# EAGLE board PCB (EAGLE 9.7.0)
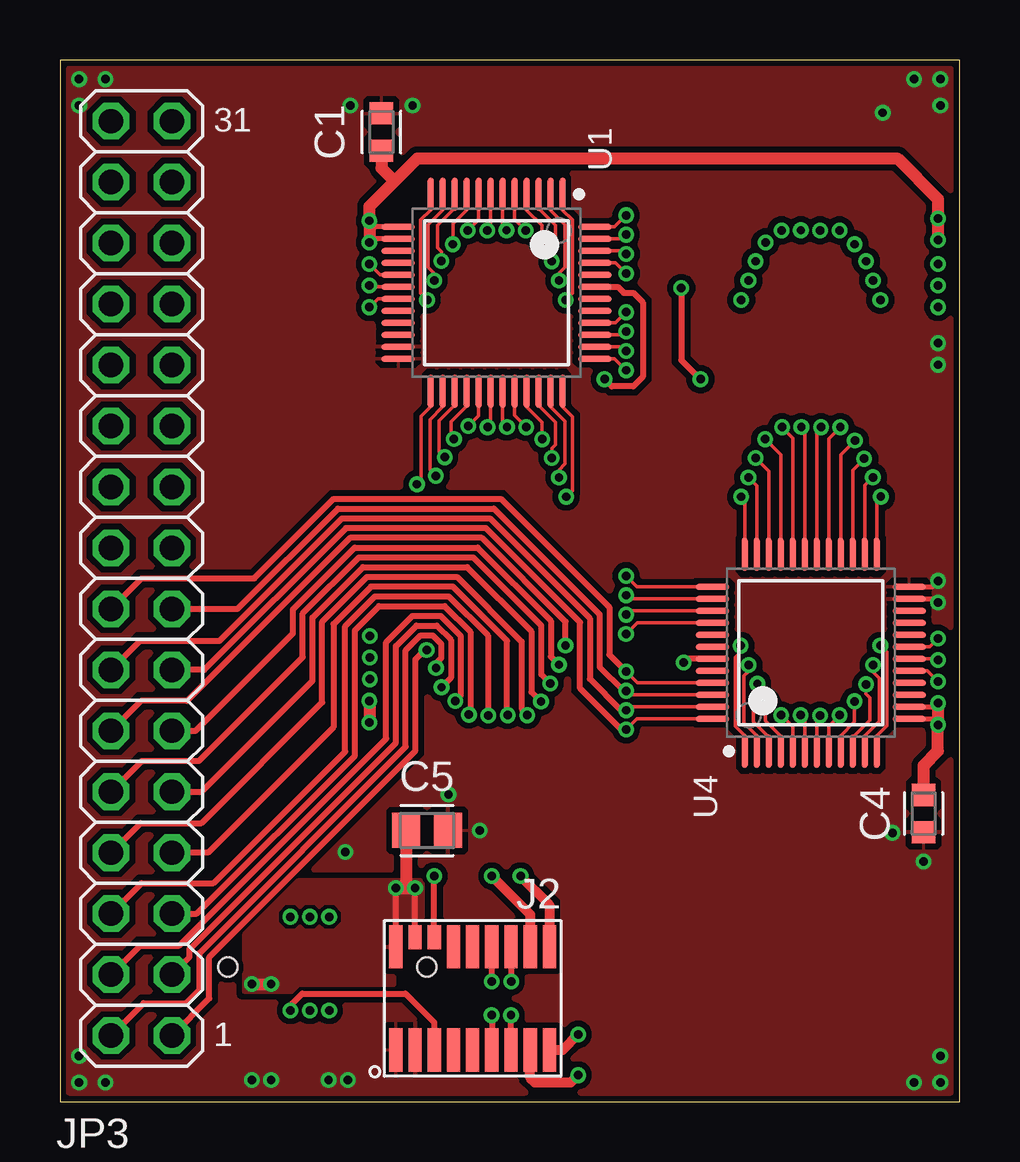
[diagram p0: board, top side]
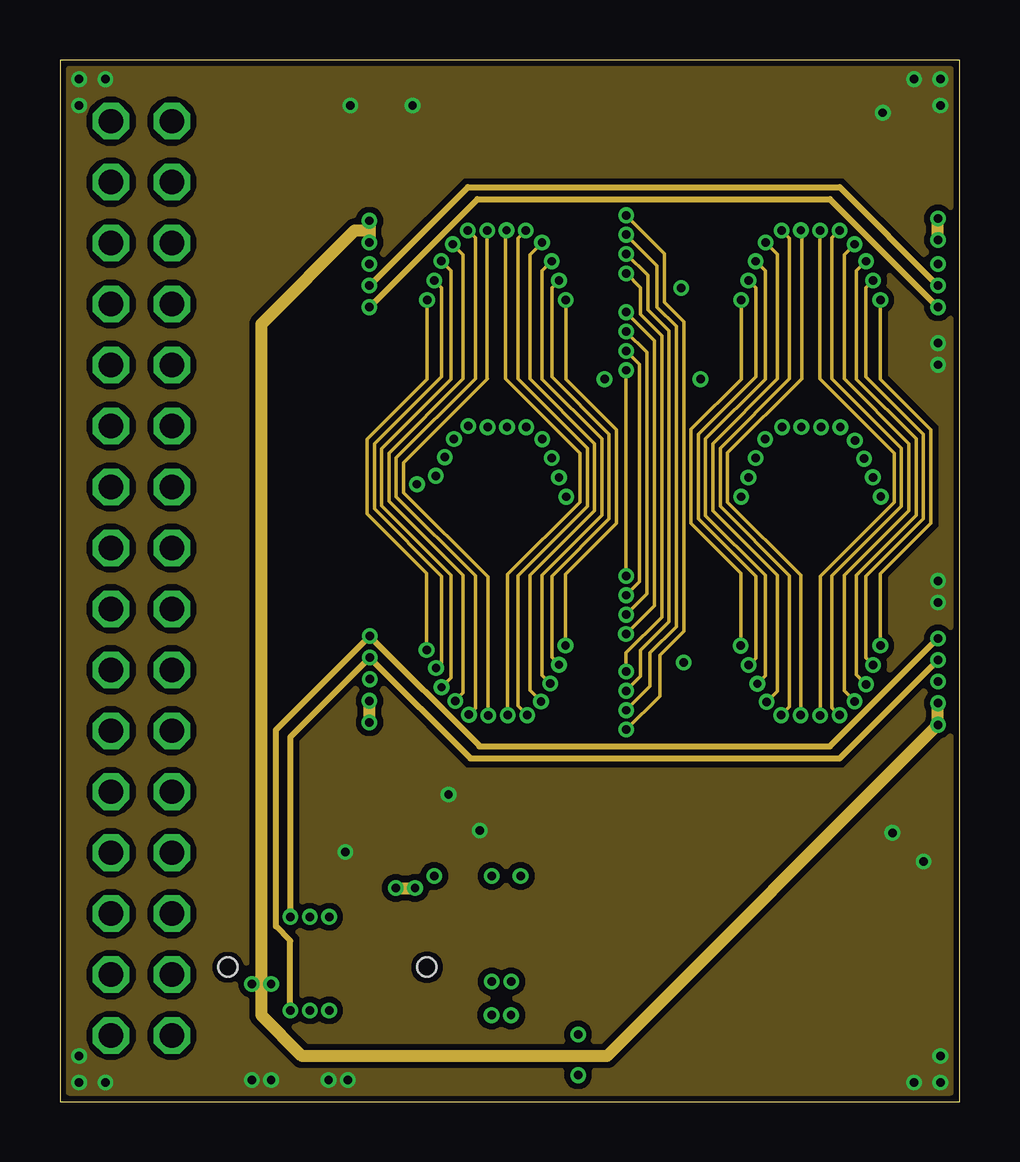
[diagram p1: board, inner layer Route2]
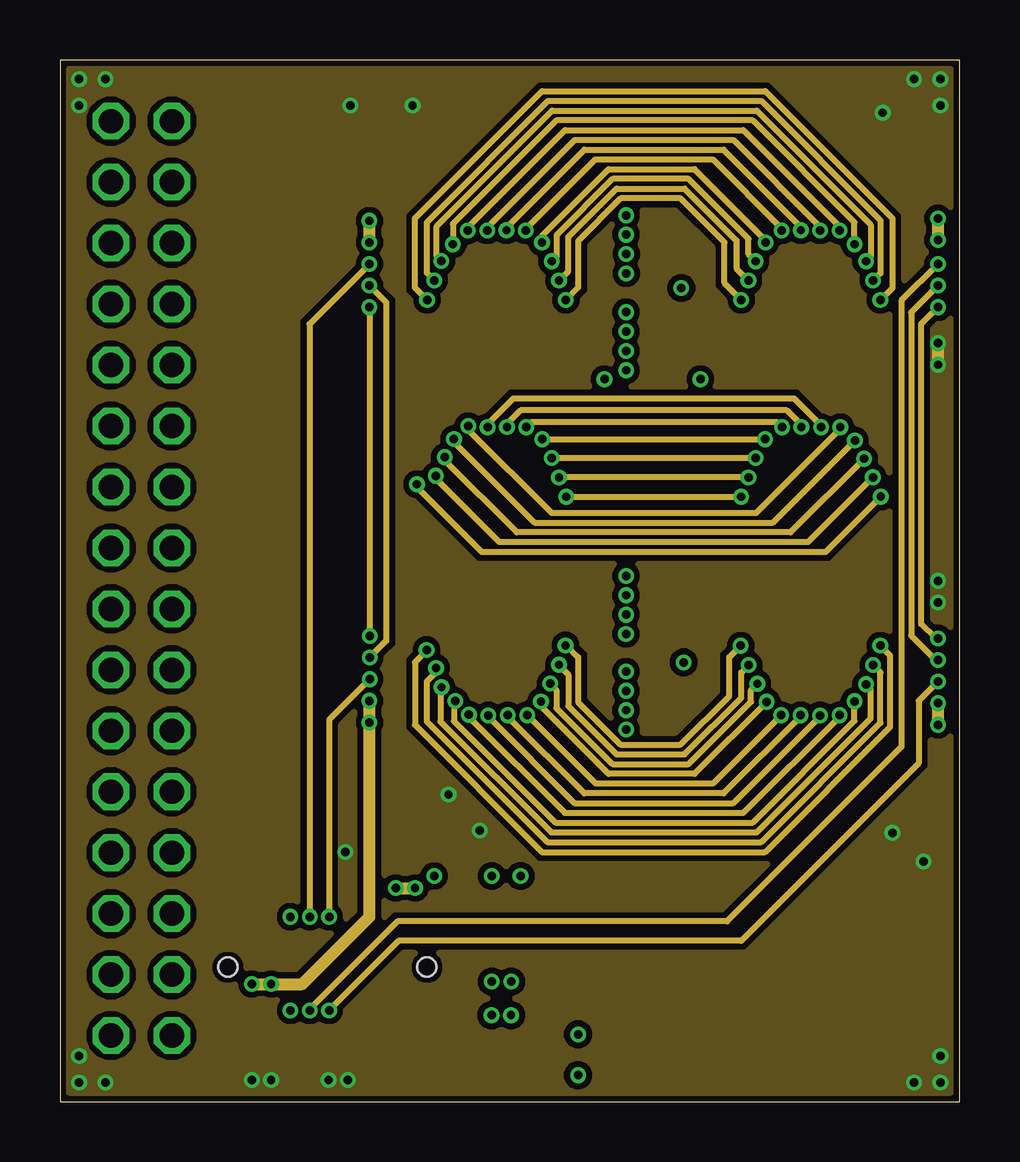
[diagram p2: board, inner layer Route15]
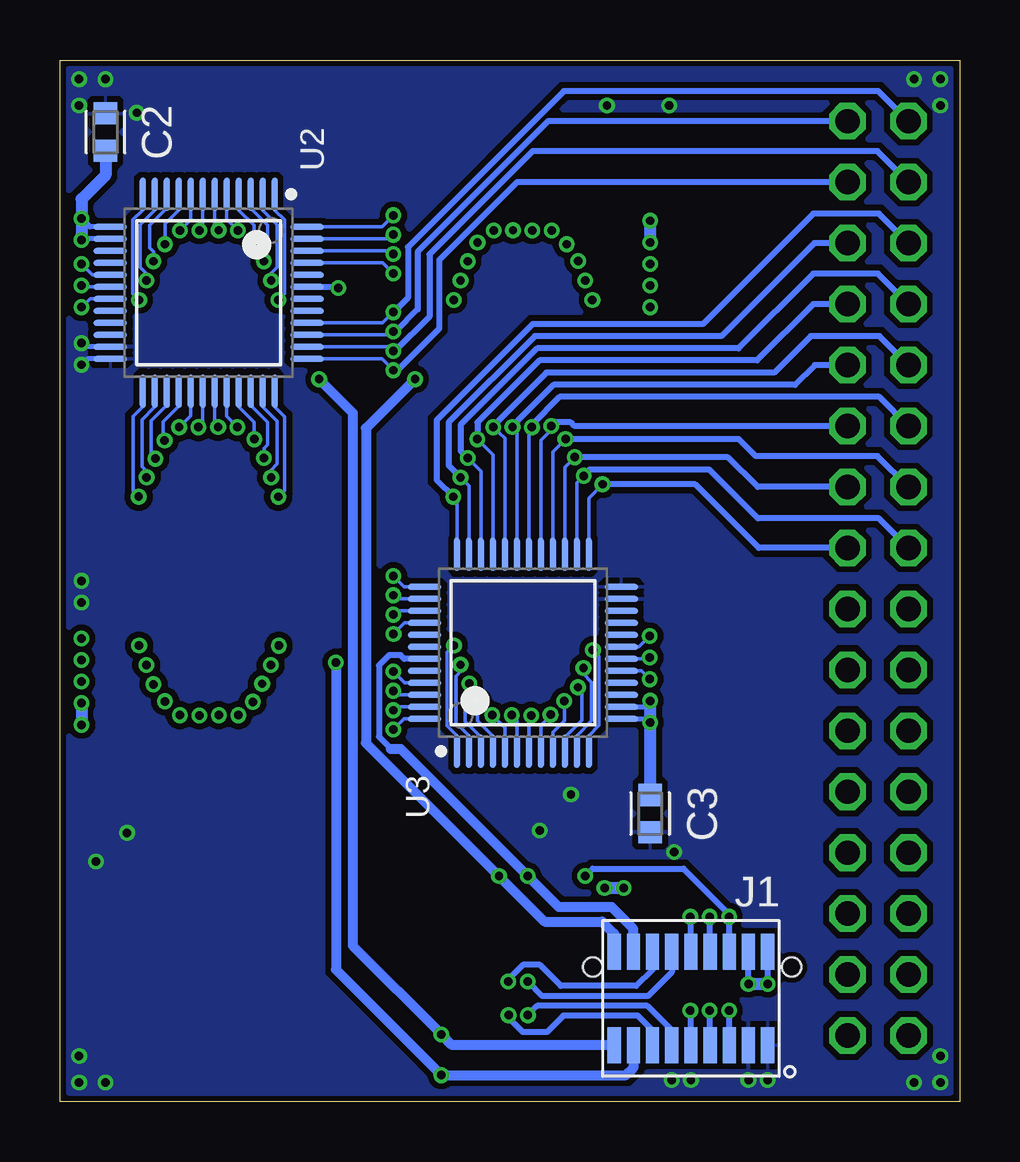
[diagram p3: board, bottom side, seen from below]

Size 37.5 x 43.4 mm. Coordinates in mm from the lower left corner, seen from the top.
Outline: 0,0 37.5,0 37.5,43.4 0,43.4 0,0
Copper layers (1+2*15+16): Top 0.035mm / dielectric 1.5mm / Route2 0.035mm / dielectric 0.15mm / Route15 0.035mm / dielectric 0.2mm / Bottom 0.035mm
Design rules "default *": minimum track width 6mil, minimum drill 0.35mm, track to track 6mil, track to pad 6mil, pad to pad 6mil, via to via 6mil, smd to smd 6mil, copper to edge 10mil, drill to drill 6mil, minimum pad ring 10mil, minimum via ring 6mil, stop-mask expansion 3mil, vias tented up to drill 15mil, thermal gap 10mil
tKeepout: area 6,0 to 12,43.4

## Footprints (pad centres in the part's own frame; a part is rotated, then mirrored left to right if it is on the bottom)
CAPC1608X85 = smd 0.921 x 0.97: 1 -0.775,0; 2 0.775,0
CAPC2012X110 = smd 1.165 x 1.465: 1 -0.875,0; 2 0.875,0
MOLEX_52465-1870 = smd 0.55 x 1.5: P$1 -3.2,1.95; P$2 -3.2,-1.95; P$3 -2.4,1.95; P$4 -2.4,-1.95; P$5 -1.6,1.95; P$6 -1.6,-1.95; P$7 -0.8,1.95; P$8 -0.8,-1.95; P$9 0,1.95; P$10 0,-1.95; P$11 0.8,1.95; P$12 0.8,-1.95; P$13 1.6,1.95; P$14 1.6,-1.95; P$15 2.4,1.95; P$16 2.4,-1.95; P$17 3.2,1.95; P$18 3.2,-1.95 | hole 0.8: -4.2,-1.3; 4.1,-1.3
MOLEX_53307-1871_MOD = smd 0.55 x 1.8: P$1 3.2,2.15; P$2 3.2,-2.15; P$3 2.4,2.15; P$5 1.6,2.15; P$7 0.8,2.15; P$8 0.8,-2.15; P$9 0,2.15; P$10 0,-2.15; P$11 -0.8,2.15; P$12 -0.8,-2.15; P$13 -1.6,2.15; P$14 -1.6,-2.15; P$15 -2.4,2.15; P$16 -2.4,-2.15; P$17 -3.2,2.15; P$18 -3.2,-2.15 | smd 0.55 x 1: P$4 2.4,-2.55; P$6 1.6,-2.55
2X16 = drill 1.016 octagon: 1 -19.05,-1.27; 2 -19.05,1.27; 3 -16.51,-1.27; 4 -16.51,1.27; 5 -13.97,-1.27; 6 -13.97,1.27; 7 -11.43,-1.27; 8 -11.43,1.27; 9 -8.89,-1.27; 10 -8.89,1.27; 11 -6.35,-1.27; 12 -6.35,1.27; 13 -3.81,-1.27; 14 -3.81,1.27; 15 -1.27,-1.27; 16 -1.27,1.27; 17 1.27,-1.27; 18 1.27,1.27; 19 3.81,-1.27; 20 3.81,1.27; 21 6.35,-1.27; 22 6.35,1.27; 23 8.89,-1.27; 24 8.89,1.27; 25 11.43,-1.27; 26 11.43,1.27; 27 13.97,-1.27; 28 13.97,1.27; 29 16.51,-1.27; 30 16.51,1.27; 31 19.05,-1.27; 32 19.05,1.27
ANALOG_DEVICES_ADG731BSUZ_0 = smd 1.4 x 0.25: 1 -4.1,2.75; 2 -4.1,2.25; 3 -4.1,1.75; 4 -4.1,1.25; 5 -4.1,0.75; 6 -4.1,0.25; 7 -4.1,-0.25; 8 -4.1,-0.75; 9 -4.1,-1.25; 10 -4.1,-1.75; 11 -4.1,-2.25; 12 -4.1,-2.75; 25 4.1,-2.75; 26 4.1,-2.25; 27 4.1,-1.75; 28 4.1,-1.25; 29 4.1,-0.75; 30 4.1,-0.25; 31 4.1,0.25; 32 4.1,0.75; 33 4.1,1.25; 34 4.1,1.75; 35 4.1,2.25; 36 4.1,2.75 | smd 0.25 x 1.4: 13 -2.75,-4.1; 14 -2.25,-4.1; 15 -1.75,-4.1; 16 -1.25,-4.1; 17 -0.75,-4.1; 18 -0.25,-4.1; 19 0.25,-4.1; 20 0.75,-4.1; 21 1.25,-4.1; 22 1.75,-4.1; 23 2.25,-4.1; 24 2.75,-4.1; 37 2.75,4.1; 38 2.25,4.1; 39 1.75,4.1; 40 1.25,4.1; 41 0.75,4.1; 42 0.25,4.1; 43 -0.25,4.1; 44 -0.75,4.1; 45 -1.25,4.1; 46 -1.75,4.1; 47 -2.25,4.1; 48 -2.75,4.1

## Placement (x,y rotation side)
C1  0.1uF  [CAPC1608X85]  13.4,40.4 270 top
C2  0.1uF  [CAPC1608X85]  35.6,40.4 270 bottom
C3  0.1uF  [CAPC1608X85]  12.9,12 90 bottom
C4  0.1uF  [CAPC1608X85]  36,12 90 top
C5  10uF  [CAPC2012X110]  15.3,11.3 180 top
J1  MOLEX_52465-1870  [MOLEX_52465-1870]  11.2,4.3 180 bottom
J2  MOLEX_53307-1871MOD  [MOLEX_53307-1871_MOD]  17.2,4.3 180 top
JP3  PINHD-2X16  [2X16]  3.4,21.8 90 top
U1  ANALOG_DEVICES_ADG731BSUZANALOG_DEVICES_ADG731BSUZ_0_0  [ANALOG_DEVICES_ADG731BSUZ_0]  18.2,33.7 270 top
U2  ANALOG_DEVICES_ADG731BSUZANALOG_DEVICES_ADG731BSUZ_0_0  [ANALOG_DEVICES_ADG731BSUZ_0]  31.3,33.7 270 bottom
U3  ANALOG_DEVICES_ADG731BSUZANALOG_DEVICES_ADG731BSUZ_0_0  [ANALOG_DEVICES_ADG731BSUZ_0]  18.2,18.7 90 bottom
U4  ANALOG_DEVICES_ADG731BSUZANALOG_DEVICES_ADG731BSUZ_0_0  [ANALOG_DEVICES_ADG731BSUZ_0]  31.3,18.7 90 top

## Library data of the parts
C1-C5 = Capacitor; CATEGORY: Capacitor
J1 = Molex 52465-1870
J2 = Molex 53307-1871
JP3 = Connector
U1-U4 = Analog Devices - ADG731BSUZ; BANDWIDTH_HZ: 18M; CIIVA_IDS: 19300650; CODE__JEDEC: MS-026ABC; COMPONENT_LINK_1_DESCRIPTION: Manufacturer URL; COMPONENT_LINK_1_URL: http://www.analog.com/en/index.html; COMPONENT_LINK_3_DESCRIPTION: Package Specification; COMPONENT_LINK_3_URL: http://www.analog.com/static/imported-files/packages/470644706845302410119987SU48_7x7.pdf; DATASHEET: http://www.analog.com/static/imported-files/data_sheets/ADG725_731.pdf; DATASHEET_VERSION: Rev. A; FOOTPRINT_VARIANT_NAME_0: Level C; FOOTPRINT_VARIANT_NAME_1: Level B; FOOTPRINT_VARIANT_NAME_2: Level A; IMPORTED: yes; IMPORTED_FROM: vault; IMPORT_TS: 1521857462; MAX_ANALOG_SIGNAL_RANGE: Vss to Vdd; MF: Analog Devices; MOUNTING_TECHNOLOGY: Surface Mount; MPN: ADG731BSUZ; PACKAGE: SU-48; PACKAGE_DESCRIPTION: 48-Pin Thin Plastic Quad Flat Package, Body 7 x 7 mm, Pitch 0.5 mm; PACKING: Tray; PIN_0_0_39_INSIDE_EDGE: clock; PREFIX: U; RELEASE_DATE: 1391089390; RON_OHMS: 4; SUPPLY_V_GUAR_PERFORMANCE: Dual_(+/-2.5V), Single_(+3V), Single_(+5V); T_TRANSITION_S: 42n; VAULT_GUID: 76926279-8684-441A-80C4-6DFBDCC65274; VAULT_REVISION: 8C21F4D2-BBAB-4E50-B4EF-AC8EEE00B0BF

## Nets
+5V: C1.2 C2.2 C3.2 C4.2 C5.2 J1.P$2 J1.P$4 J2.P$2 J2.P$4 U1.13 U1.14 U2.13 U2.14 U3.13 U3.14 U4.13 U4.14
CS1: J1.P$10 U3.17
CS2: J1.P$8 U1.17
CS3: J1.P$9 U4.17
CS4: J1.P$7 U2.17
CS5: J1.P$14 J2.P$14
CS6: J1.P$12 J2.P$12
CS7: J1.P$13 J2.P$13
CS8: J1.P$11 J2.P$11
D1: J1.P$16 J2.P$16 U3.43
D2: J1.P$18 J2.P$18 U1.43
D3: J1.P$15 J2.P$15 U4.43
D4: J1.P$17 J2.P$17 U2.43
DAT: J1.P$6 J2.P$6 U1.18 U2.18 U3.18 U4.18
GND: C1.1 C2.1 C3.1 C4.1 C5.1 J1.P$1 J1.P$3 J2.P$1 J2.P$3 U1.23 U1.24 U2.23 U2.24 U3.23 U3.24 U4.23 U4.24
S1: JP3.1 U1.12 U2.12 U3.12 U4.12
S2: JP3.2 U1.11 U2.11 U3.11 U4.11
S3: JP3.3 U1.10 U2.10 U3.10 U4.10
S4: JP3.4 U1.9 U2.9 U3.9 U4.9
S5: JP3.5 U1.8 U2.8 U3.8 U4.8
S6: JP3.6 U1.7 U2.7 U3.7 U4.7
S7: JP3.7 U1.6 U2.6 U3.6 U4.6
S8: JP3.8 U1.5 U2.5 U3.5 U4.5
S9: JP3.9 U1.4 U2.4 U3.4 U4.4
S10: JP3.10 U1.3 U2.3 U3.3 U4.3
S11: JP3.11 U1.2 U2.2 U3.2 U4.2
S12: JP3.12 U1.1 U2.1 U3.1 U4.1
S13: JP3.13 U1.48 U2.48 U3.48 U4.48
S14: JP3.14 U1.47 U2.47 U3.47 U4.47
S15: JP3.15 U1.46 U2.46 U3.46 U4.46
S16: JP3.16 U1.45 U2.45 U3.45 U4.45
S17: JP3.17 U1.25 U2.25 U3.25 U4.25
S18: JP3.18 U1.26 U2.26 U3.26 U4.26
S19: JP3.19 U1.27 U2.27 U3.27 U4.27
S20: JP3.20 U1.28 U2.28 U3.28 U4.28
S21: JP3.21 U1.29 U2.29 U3.29 U4.29
S22: JP3.22 U1.30 U2.30 U3.30 U4.30
S23: JP3.23 U1.31 U2.31 U3.31 U4.31
S24: JP3.24 U1.32 U2.32 U3.32 U4.32
S25: JP3.25 U1.33 U2.33 U3.33 U4.33
S26: JP3.26 U1.34 U2.34 U3.34 U4.34
S27: JP3.27 U1.35 U2.35 U3.35 U4.35
S28: JP3.28 U1.36 U2.36 U3.36 U4.36
S29: JP3.29 U1.37 U2.37 U3.37 U4.37
S30: JP3.30 U1.38 U2.38 U3.38 U4.38
S31: JP3.31 U1.39 U2.39 U3.39 U4.39
S32: JP3.32 U1.40 U2.40 U3.40 U4.40
SCLK: J1.P$5 J2.P$5 U1.19 U2.19 U3.19 U4.19

## Tracks (layer width: path | path; a pad name or v marks a point on that pad's centre or on a via)
+5V  (via drill 0.35)
  Top 0.203: U1.14 13.05,35.95 v12.9,35.8 | U1.13 13.15,36.45 v12.9,36.7 | U4.14 36.45,16.45 v36.6,16.6 | U4.13 36.35,15.95 v36.6,15.7
  Top 0.254: J2.P$2 v14,8.9 | J2.P$4 v14.8,8.9
  Top 0.508: 13.95,38.35 12.9,37.3 v12.9,36.7 v12.9,35.8 | 13.95,38.35 14.9,39.3 34.9,39.3 36.6,37.6 v36.6,36.8 v36.6,35.9 | C1.2 13.4,38.9 13.95,38.35 | C4.2 36,14 36.6,14.6 v36.6,15.7 v36.6,16.6 | v12.9,16.7 v12.9,15.8 | v14,8.9 14.4,8.9 | 14.4,8.9 v14.8,8.9 | C5.2 14.43,8.93 14.4,8.9 | v8,4.9 v8.8,4.9
  Route2 0.508: v12.9,36.7 12.9,36.3 | 12.9,36.3 v12.9,35.8 | v8,4.9 8.4,4.9 | 8.4,4.9 v8.8,4.9 | 8.4,4.9 8.4,32.4 12.3,36.3 12.9,36.3 | v36.6,16.6 v36.6,15.7 22.8,1.9 10.1,1.9 8.4,3.6 8.4,4.9 | v14,8.9 v14.8,8.9 | v12.9,15.8 v12.9,16.7 | v36.6,35.9 v36.6,36.8
  Route15 0.508: v8,4.9 v8.8,4.9 10.1,4.9 12.9,7.7 v12.9,15.8 v12.9,16.7 | v14,8.9 v14.8,8.9 | v12.9,35.8 v12.9,36.7 | v36.6,36.8 v36.6,35.9 | v36.6,16.6 v36.6,15.7
  Bottom 0.203: U2.14 36.55,35.95 v36.6,35.9 | U2.13 36.25,36.45 v36.6,36.8 | U3.14 13.15,16.45 v12.9,16.7 | U3.13 13.05,15.95 v12.9,15.8
  Bottom 0.254: v8.8,4.9 J1.P$4 | v8,4.9 J1.P$2
  Bottom 0.508: C2.2 35.6,38.6 36.6,37.6 v36.6,36.8 v36.6,35.9 | C3.2 v12.9,15.8 v12.9,16.7 | v8,4.9 v8.8,4.9 | v14,8.9 v14.8,8.9 | v12.9,36.7 v12.9,35.8 | v36.6,16.6 v36.6,15.7
  pour Top: 7.6,4.5 14,4.5 14,6.8 15.2,6.8 15.2,9.3 7.6,9.3
CS1  (via drill 0.35, 0.35 pad 0.55)
  Route15 0.254: v12.91,17.6 11.22,15.91 v11.22,7.7
  Bottom 0.152: U3.17 13.26,17.95 v12.91,17.6
  Bottom 0.254: J1.P$10 11.2,7.68 v11.22,7.7
CS2  (via drill 0.35, 0.35 pad 0.55)
  Top 0.152: U1.17 13.35,34.45 v12.9,34.9
  Route15 0.254: v12.9,34.9 10.4,32.4 10.4,7.71 v10.41,7.7
  Bottom 0.254: J1.P$8 10.4,7.69 v10.41,7.7
CS3  (via drill 0.35, 0.35 pad 0.55)
  Top 0.152: v36.6,17.5 36.15,17.95 U4.17
  Route15 0.254: v36.6,17.5 35.8,16.7 35.8,14.1 28.4,6.7 14.12,6.7 v11.22,3.8
  Bottom 0.254: J1.P$9 11.2,3.78 v11.22,3.8
CS4  (via drill 0.35, 0.35 pad 0.55)
  Route15 0.254: v10.41,3.8 10.41,3.85 14.07,7.51 27.81,7.51 35.08,14.78 35.08,33.38 v36.6,34.9
  Bottom 0.152: v36.6,34.9 36.15,34.45 U2.17
  Bottom 0.254: J1.P$7 10.4,3.79 v10.41,3.8
CS5  (via drill 0.35)
  Top 0.254: v18.81,5 J2.P$14
  Bottom 0.254: v18.81,5 18.81,5.09 18.2,5.7 17.5,5.7 16.62,4.82 13.48,4.82 12.8,5.5 J1.P$14
CS6  (via drill 0.35)
  Top 0.254: v18,5 J2.P$12
  Bottom 0.254: v18,5 17.4,4.4 13,4.4 12,5.4 J1.P$12
CS7  (via drill 0.35)
  Top 0.254: J2.P$13 v18.8,3.6
  Bottom 0.254: v18.8,3.6 18.8,3.5 18.2,2.9 17.2,2.9 16.52,3.58 13.41,3.58 12.8,2.97 J1.P$13
CS8  (via drill 0.35)
  Top 0.254: v17.99,3.6 v18,3.59 J2.P$11
  Bottom 0.254: v17.99,3.6 17.61,3.99 13.02,3.99 12,2.97 J1.P$11
D1  (via drill 0.35)
  Top 0.406: v18,9.4 19.6,7.8 J2.P$16
  Bottom 0.254: U3.43 23.15,18.45 23.3,18.6 23.78,18.6 24.21,18.17 24.21,15.21 23.7,14.7
  Bottom 0.406: 23.7,14.7 23.3,14.7 v18,9.4 16.7,8.1 14.5,8.1 13.6,7.2 J1.P$16
D2  (via drill 0.35)
  Top 0.254: U1.43 23.25,33.95 23.5,33.7 23.9,33.7 24.3,33.3 24.3,30.2 23.9,29.8 23,29.8 v22.7,30.1
  Top 0.406: v19.2,9.4 20.4,8.2 J2.P$18
  Bottom 0.406: v22.7,30.1 24.74,28.06 24.74,14.94 v19.2,9.4 17.3,7.5 14.9,7.5 14.4,7 J1.P$18
D3  (via drill 0.35)
  Top 0.254: U4.43 26.15,18.45 v26,18.3
  Top 0.406: v21.6,1.1 21.3,0.8 19.8,0.8 19.6,1 J2.P$15
  Bottom 0.406: v26,18.3 26,5.5 v21.6,1.1 13.9,1.1 13.6,1.4 J1.P$15
D4  (via drill 0.35)
  Top 0.254: v25.9,33.9 25.9,30.9 v26.7,30.1
  Top 0.406: v21.6,2.8 20.95,2.15 J2.P$17
  Bottom 0.254: U2.43 25.95,33.95 v25.9,33.9
  Bottom 0.406: v26.7,30.1 25.3,28.7 25.3,6.5 v21.6,2.8 21.15,2.35 J1.P$17
DAT  (via drill 0.35, 0.35 pad 0.55)
  Top 0.152: U4.18 36.55,18.45 v36.6,18.4 | U1.18 12.95,33.95 v12.9,34
  Top 0.254: J2.P$6 v15.6,9.4
  Route2 0.254: v12.9,34 17,38.1 32.5,38.1 v36.6,34 | v36.6,18.4 32.5,14.3 17.11,14.3 v12.91,18.5 9.61,15.19 v9.61,7.7
  Route15 0.254: v12.9,34 13.6,33.3 13.6,19.2 12.91,18.51 v12.91,18.5 | v36.6,34 35.49,32.89 35.49,19.41 36.5,18.4 v36.6,18.4
  Bottom 0.152: U2.18 36.55,33.95 v36.6,34 | U3.18 12.96,18.45 v12.91,18.5
  Bottom 0.254: v15.6,9.4 15.29,9.71 11.51,9.71 9.61,7.81 v9.61,7.7 v9.6,7.69 J1.P$6
GND  (via drill 0.35)
  Top 0.203: U4.23 36.45,20.95 v36.6,20.8 | U4.24 36.35,21.45 v36.6,21.7
  Route15 0.508: v36.6,31.6 v36.6,30.7
  Bottom 0.203: U2.23 36.45,31.45 v36.6,31.6 | U2.24 36.35,30.95 v36.6,30.7
  other vias: 17.5,11.3 16.2,12.8 8.8,0.9 8,0.9 12,0.9 11.2,0.9 11.9,10.4 36,10 34.7,11.2 35.6,42.6 34.3,41.2 14.7,41.5 12.1,41.5 36.7,0.8 36.7,1.9 35.6,0.8 0.8,0.8 1.9,0.8 0.8,1.9 0.8,42.6 1.9,42.6 0.8,41.5 36.7,42.6 36.7,41.5
  pour Top (isolate 0.254, rank 2): 0,0 37.5,0 37.5,43.4 0,43.4
  pour Route2 (isolate 0.254): 0,0 37.5,0 37.5,43.4 0,43.4
  pour Route15 (isolate 0.254): 0,0 37.5,0 37.5,43.4 0,43.4
  pour Bottom (isolate 0.254, rank 2): 0,0 37.5,0 37.5,43.4 0,43.4
S1  (via drill 0.35 pad 0.55)
  Top 0.152: U1.12 15.45,37.15 15.04,36.74 15.04,33.67 v15.3,33.41 | U4.12 34.05,15.25 34.46,15.66 34.46,18.74 v34.2,19
  Top 0.254: JP3.1 6.22,4.3 6.22,6.02 14.82,14.62 14.82,18.42 15.2,18.8 15.27,18.8 v15.28,18.82
  Route2 0.152: v34.2,33.4 34.2,30.1 36.3,28 36.3,24.1 34.2,22 v34.2,19 | v15.3,33.41 v15.3,33.4 15.3,30.1 12.8,27.6 12.8,24.5 15.28,22.02 v15.28,18.82
  Route15 0.254: v15.3,33.41 14.8,33.91 14.8,36.8 20.1,42.1 29.4,42.1 34.7,36.8 34.7,33.9 v34.2,33.4 | v34.2,19 34.61,18.59 34.61,15.61 29.4,10.4 20.1,10.4 14.8,15.7 14.8,18.3 15.28,18.79 v15.28,18.82
  Bottom 0.152: U3.12 15.45,15.25 15.03,15.67 15.03,18.55 15.28,18.8 v15.28,18.82 | U2.12 34.05,37.15 34.46,36.74 34.46,33.66 v34.2,33.4
S2  (via drill 0.35 pad 0.55)
  Top 0.152: U1.11 15.95,37.15 15.34,36.54 15.34,34.77 15.6,34.51 v15.6,34.21 | U4.11 33.55,15.25 34.16,15.86 34.16,17.63 33.9,17.89 v33.9,18.19
  Top 0.254: JP3.2 3.48,4.1 5.25,4.1 5.81,4.66 5.81,6.19 14.41,14.79 14.41,18.81 15.03,19.43 15.54,19.43 15.89,19.07 15.89,18.48 15.68,18.27 v15.68,18.07
  Route2 0.152: v15.6,34.21 15.9,33.91 15.9,30.2 13.11,27.41 13.11,24.69 15.9,21.9 15.9,18.3 v15.68,18.07 | v33.9,18.19 33.6,18.49 33.6,21.9 35.99,24.3 35.99,27.8 33.6,30.2 33.6,33.91 v33.9,34.21
  Route15 0.254: v33.9,18.19 34.21,17.89 34.21,15.78 29.23,10.81 20.32,10.81 15.28,15.84 15.28,17.5 15.68,17.9 v15.68,18.07 | v15.6,34.21 15.29,34.52 15.29,36.64 20.35,41.69 29.23,41.69 34.21,36.72 34.21,34.51 v33.9,34.21
  Bottom 0.152: U3.11 15.95,15.25 15.33,15.87 15.33,17.48 15.68,17.83 v15.68,18.07 | U2.11 33.55,37.15 34.16,36.54 34.16,34.77 33.9,34.51 v33.9,34.21
S3  (via drill 0.35 pad 0.55)
  Top 0.152: U1.10 16.45,37.22 15.74,36.51 15.74,35.57 15.9,35.41 v15.9,35.02 | U4.10 33.05,15.18 33.76,15.89 33.76,16.83 33.6,16.99 v33.6,17.39
  Top 0.254: JP3.3 5.41,6.03 5.41,6.36 14.01,14.96 14.01,18.98 14.86,19.83 15.7,19.83 16.3,19.24 16.3,17.66 v15.91,17.27
  Route2 0.152: v15.9,35.02 v15.9,35.01 16.3,34.61 16.3,30.11 13.41,27.21 13.41,24.82 16.3,21.93 16.3,17.66 v15.91,17.27 | v33.6,17.39 33.2,17.79 33.2,21.93 35.69,24.42 35.69,27.61 33.2,30.11 33.2,34.61 v33.6,35.01
  Route15 0.254: v33.6,17.39 33.8,17.19 33.8,15.97 29.05,11.21 20.49,11.21 15.86,15.84 15.86,17.22 v15.91,17.27 | v15.9,35.02 15.7,35.22 15.7,36.47 20.52,41.29 29.05,41.29 33.8,36.53 33.8,35.21 v33.6,35.01
  Bottom 0.152: U3.10 16.45,15.18 15.74,15.89 15.74,17.1 v15.91,17.27 | U2.10 33.05,37.22 33.76,36.51 33.76,35.57 33.6,35.41 v33.6,35.01
S4  (via drill 0.35 pad 0.55)
  Top 0.152: U1.9 16.95,37.15 16.38,36.58 v16.38,35.72 | U4.9 32.55,15.25 33.12,15.82 v33.12,16.68
  Top 0.254: JP3.4 3.34,6.5 4.98,6.5 13.6,15.12 13.6,19.14 14.7,20.24 15.87,20.24 16.7,19.41 16.7,16.92 v16.48,16.69
  Route2 0.152: v16.38,35.72 16.81,35.29 16.81,30.11 13.72,27.02 13.72,25.02 16.81,21.92 16.81,17.03 v16.48,16.69 | v33.12,16.68 32.69,17.11 32.69,21.92 35.39,24.62 35.39,27.41 32.69,30.11 32.69,35.29 v33.12,35.72
  Route15 0.254: v33.12,16.68 33.12,15.86 28.88,11.62 20.66,11.62 16.42,15.85 16.42,16.64 v16.48,16.69 | v16.38,35.72 16.38,36.57 20.69,40.88 28.88,40.88 33.12,36.64 v33.12,35.72
  Bottom 0.152: U2.9 32.55,37.15 33.12,36.58 v33.12,35.72 | U3.9 16.95,15.4 16.47,15.87 v16.47,16.69 v16.48,16.69
S5  (via drill 0.35 pad 0.55)
  Top 0.152: U1.8 17.45,36.75 v17,36.3 | U4.8 32.05,15.65 v32.5,16.1
  Top 0.254: JP3.5 5.71,7.83 12.29,14.42 12.29,19.64 13.3,20.65 16.04,20.65 17.11,19.58 17.11,16.19 v17.05,16.13 v17.05,16.12
  Route2 0.152: v32.5,16.1 32.19,16.41 32.19,21.92 35.08,24.81 35.08,27.22 32.19,30.11 32.19,35.99 v32.5,36.3 | v17.05,16.12 17.31,16.39 17.31,21.92 14.02,25.21 14.02,26.82 17.31,30.11 17.31,35.99 v17,36.3
  Route15 0.254: v32.5,16.1 32.5,16.04 28.48,12.03 21.05,12.03 17.05,16.02 v17.05,16.12 | v17,36.3 17,36.42 21.05,40.47 28.48,40.47 32.5,36.46 v32.5,36.3
  Bottom 0.152: U2.8 32.05,36.75 v32.5,36.3 | U3.8 17.45,15.68 17.05,16.09 v17.05,16.12
S6  (via drill 0.35 pad 0.55)
  Top 0.152: U1.7 17.95,36.44 v17.81,36.3 | U4.7 31.55,15.95 v31.69,16.09
  Top 0.254: JP3.6 3.4,9.1 6.4,9.1 11.89,14.59 11.89,19.81 13.13,21.05 16.21,21.05 17.84,19.42 17.84,16.11 v17.86,16.09
  Route2 0.152: v31.69,16.09 31.69,21.89 34.78,24.98 34.78,27.02 31.68,30.12 31.68,36.29 v31.69,36.3 | v17.86,16.09 17.84,16.11 17.84,21.86 14.32,25.37 14.32,26.62 17.82,30.12 17.81,30.13 v17.81,36.3
  Route15 0.254: v31.69,16.09 31.69,16.06 28.07,12.43 21.45,12.43 17.86,16.03 v17.86,16.09 | v17.81,36.3 17.81,36.41 21.46,40.07 28.07,40.07 31.69,36.44 v31.69,36.3
  Bottom 0.152: U2.7 31.55,36.45 v31.69,36.31 v31.69,36.3 | U3.7 17.95,15.98 17.86,16.07 v17.86,16.09
S7  (via drill 0.35 pad 0.55)
  Top 0.152: U4.6 31.05,15.93 v30.88,16.1 | U1.6 18.45,36.47 v18.61,36.31
  Top 0.254: JP3.7 6.17,10.37 11.4,15.6 11.4,19.89 12.96,21.46 16.38,21.46 18.64,19.19 18.64,16.12 v18.66,16.1
  Route2 0.152: v18.61,36.31 18.58,36.27 18.58,30.12 21.68,27.02 21.68,24.98 18.66,21.96 v18.66,16.1 | v30.88,16.1 30.88,21.93 27.83,24.97 27.83,27.03 30.92,30.12 30.92,36.27 v30.89,36.31
  Route15 0.254: v30.88,16.1 30.88,16.05 27.66,12.84 21.86,12.84 18.66,16.04 v18.66,16.1 | v18.61,36.31 18.61,36.41 21.86,39.66 27.66,39.66 30.89,36.44 v30.89,36.31
  Bottom 0.152: U2.6 31.05,36.47 v30.89,36.31 | U3.6 18.45,15.89 v18.66,16.1
S8  (via drill 0.35 pad 0.55)
  Top 0.152: U1.5 18.95,36.77 v19.42,36.3 | v30.07,16.1 30.55,15.62 U4.5
  Top 0.254: JP3.8 3.36,11.6 5.9,11.6 10.93,16.63 10.93,20 12.8,21.86 16.55,21.86 19.25,19.16 19.25,16.37 19.27,16.35 19.27,16.31 v19.48,16.1
  Route2 0.152: v19.42,36.3 19.09,35.96 19.09,30.11 21.98,27.22 21.98,24.81 19.09,21.92 19.09,16.49 v19.48,16.1 | v30.07,16.1 30.41,16.45 30.41,21.92 27.52,24.81 27.52,27.22 30.41,30.11 30.41,35.96 v30.08,36.3
  Route15 0.254: v30.07,16.1 27.21,13.24 22.34,13.24 v19.48,16.1 | v19.42,36.3 19.42,36.36 22.31,39.26 27.21,39.26 30.08,36.39 v30.08,36.3
  Bottom 0.152: U2.5 30.55,36.77 v30.08,36.3 | U3.5 18.95,15.57 v19.48,16.1
S9  (via drill 0.35 pad 0.55)
  Top 0.152: U1.4 19.45,37.15 20.09,36.51 v20.09,35.8 | U4.4 30.05,15.23 29.41,15.87 29.41,16.61 v29.46,16.66
  Top 0.254: JP3.9 5.91,12.91 10.53,17.53 10.53,20.17 12.63,22.27 16.98,22.27 19.65,19.59 19.65,17.07 v20.05,16.67
  Route2 0.152: v20.09,35.8 v20.09,35.79 19.59,35.29 19.59,30.11 22.29,27.41 22.29,24.62 19.59,21.92 19.59,17.13 v20.05,16.67 | v29.46,16.66 29.91,17.11 29.91,21.92 27.22,24.61 27.22,27.42 29.91,30.11 29.91,35.3 v29.41,35.8
  Route15 0.254: v29.46,16.66 26.45,13.65 22.87,13.65 20.05,16.47 v20.05,16.67 | v20.09,35.8 v20.1,35.81 20.1,36.08 22.87,38.85 26.45,38.85 29.41,35.89 v29.41,35.8
  Bottom 0.152: U3.4 19.45,15.23 20.09,15.87 20.09,16.63 v20.05,16.67 | U2.4 30.05,37.15 29.41,36.51 v29.41,35.8
S10  (via drill 0.35 pad 0.55)
  Top 0.152: U1.3 19.95,37.22 20.66,36.51 20.66,35.57 20.5,35.41 v20.5,35.01 | U4.3 29.55,15.18 28.91,15.83 28.91,16.99 29.07,17.16 v29.07,17.41
  Top 0.254: JP3.10 3.42,14.2 5.8,14.2 10.12,18.52 10.12,20.34 12.46,22.68 17.22,22.68 20.06,19.84 20.06,17.8 v20.44,17.43
  Route2 0.152: v20.5,35.01 20.09,34.61 20.09,30.11 22.59,27.61 22.59,24.42 20.09,21.93 20.09,17.77 v20.44,17.43 | v29.07,17.41 29.41,17.74 29.41,21.93 26.91,24.42 26.91,27.61 29.41,30.11 29.41,34.61 v29,35.01
  Route15 0.254: v29.07,17.41 28.81,17.14 28.81,16.66 26.21,14.06 23.04,14.06 20.69,16.4 20.69,17.14 20.44,17.4 v20.44,17.43 | v20.5,35.01 20.7,35.21 20.7,36.11 23.04,38.44 26.21,38.44 28.7,35.95 28.7,35.31 v29,35.01
  Bottom 0.152: U3.3 19.95,15.18 20.61,15.84 20.61,16.97 20.44,17.14 v20.44,17.43 | U2.3 29.55,37.22 28.84,36.51 28.84,35.57 29,35.41 v29,35.01
S11  (via drill 0.35 pad 0.55)
  Top 0.152: U1.2 20.45,37.15 21.06,36.54 21.06,34.77 20.8,34.51 v20.8,34.21 | U4.2 29.05,15.25 28.52,15.78 28.52,17.74 28.71,17.93 v28.71,18.19
  Top 0.254: JP3.11 5.65,15.45 9.71,19.51 9.71,20.51 12.29,23.09 17.41,23.09 20.47,20.03 20.47,18.54 v20.8,18.2
  Route2 0.152: v20.8,34.21 20.5,33.91 20.5,30.2 22.89,27.8 22.89,24.3 20.5,21.9 20.5,18.5 v20.8,18.2 | v28.71,18.19 29,18.48 29,21.9 26.61,24.29 26.61,27.81 29,30.2 29,33.91 v28.7,34.21
  Route15 0.254: v28.71,18.19 28.4,17.88 28.4,16.82 26.04,14.46 23.2,14.46 21.19,16.47 21.19,17.79 20.8,18.18 v20.8,18.2 | v20.8,34.21 21.19,34.6 21.19,36.03 23.2,38.04 26.04,38.04 28.2,35.88 28.2,34.71 v28.7,34.21
  Bottom 0.152: U3.2 20.45,15.25 20.99,15.79 20.99,17.73 20.8,17.92 v20.8,18.2 | U2.2 29.05,37.15 28.44,36.54 28.44,34.77 28.7,34.51 v28.7,34.21
S12  (via drill 0.35 pad 0.55)
  Top 0.152: U1.1 20.95,37.15 21.36,36.74 21.36,33.67 v21.09,33.4 | U4.1 28.55,15.25 28.15,15.65 28.15,18.52 28.38,18.75 v28.38,19
  Top 0.254: JP3.12 3.38,16.7 5.3,16.7 12.09,23.49 17.58,23.49 21.07,20 v21.07,19.01
  Route2 0.152: v28.38,19 28.38,22.02 26.3,24.09 26.3,28 28.4,30.1 v28.4,33.4 | v21.09,33.4 21.1,33.39 21.1,30.1 23.2,28 23.2,24.1 21.07,21.97 v21.07,19.01
  Route15 0.254: v28.38,19 27.9,18.52 27.9,16.9 25.87,14.87 23.37,14.87 21.6,16.64 21.6,18.52 21.11,19.01 v21.07,19.01 | v28.4,33.4 27.7,34.1 27.7,35.8 25.87,37.63 23.37,37.63 21.6,35.86 21.6,33.91 v21.09,33.4
  Bottom 0.152: U3.1 20.95,15.25 21.36,15.66 21.36,18.73 v21.07,19.01 | U2.1 28.55,37.15 28.14,36.74 28.14,33.66 v28.4,33.4
S13  (via drill 0.35 pad 0.55)
  Top 0.152: U4.48 24.05,15.95 v23.6,15.5 | U1.48 23.12,36.45 v23.6,36.93
  Top 0.254: JP3.13 6.01,17.99 11.92,23.9 17.75,23.9 21.68,19.97 21.68,17.22 23.4,15.5 v23.6,15.5
  Route2 0.152: v23.6,15.5 25,16.9 25,18.6 26,19.6 26,32.5 25.2,33.3 25.2,35.33 v23.6,36.93
  Bottom 0.152: U3.48 23.15,15.95 v23.6,15.5 | U2.48 24.08,36.45 v23.6,36.93
S14  (via drill 0.35 pad 0.55)
  Top 0.152: U4.47 23.74,16.45 v23.6,16.31 | U1.47 23.43,35.95 v23.6,36.12
  Top 0.254: JP3.14 3.34,19.2 6.65,19.2 11.75,24.3 17.92,24.3 22.09,20.14 22.09,17.61 23.39,16.31 v23.6,16.31
  Route2 0.152: v23.6,16.31 24.6,17.31 24.6,18.7 25.7,19.8 25.7,32.3 24.89,33.1 24.89,34.83 v23.6,36.12
  Bottom 0.152: U3.47 23.46,16.45 v23.6,16.31 | U2.47 23.77,35.95 v23.6,36.12
S15  (via drill 0.35 pad 0.55)
  Top 0.152: U4.46 23.76,16.95 v23.6,17.11 | U1.46 23.47,35.45 v23.61,35.31
  Top 0.254: v23.6,17.11 23.49,17.11 22.49,18.11 22.49,20.3 18.09,24.71 11.59,24.71 7.41,20.53 JP3.15
  Route2 0.152: v23.6,17.11 24.2,17.71 24.2,18.8 25.39,19.99 25.39,32.11 24.5,33 24.5,34.42 v23.61,35.31
  Bottom 0.152: U3.46 23.44,16.95 v23.6,17.11 | U2.46 23.74,35.45 v23.61,35.31
S16  (via drill 0.35 pad 0.55)
  Top 0.152: U1.45 23.16,34.95 v23.61,34.51 | U4.45 24.07,17.45 v23.6,17.92
  Top 0.254: JP3.16 3.4,21.8 8.1,21.8 11.42,25.12 18.38,25.12 22.9,20.6 22.9,18.62 v23.6,17.92
  Route2 0.152: v23.6,17.92 23.6,18.7 25.09,20.19 25.09,31.91 24.2,32.8 24.2,33.92 v23.61,34.51
  Bottom 0.152: U3.45 23.13,17.45 v23.6,17.92 | U2.45 24.05,34.95 v23.61,34.51
S17  (via drill 0.35 pad 0.55)
  Top 0.152: U1.25 15.45,28.95 15.05,28.55 15.05,25.9 v14.88,25.72 | U4.25 34.05,25.03 v34.22,25.2
  Route15 0.254: v34.22,25.2 31.91,22.9 17.59,22.9 14.88,25.61 v14.88,25.72
  Bottom 0.152: U3.25 15.45,25.15 v14.88,25.71 v14.88,25.72 | U2.25 34.05,28.95 34.45,28.55 34.45,25.43 v34.22,25.2
  Bottom 0.254: JP3.17 8.37,23.07 11.02,25.71 v14.88,25.71
S18  (via drill 0.35 pad 0.55)
  Top 0.152: U1.26 15.95,28.95 15.42,28.42 15.42,26.33 v15.67,26.07 | U4.26 33.55,25.67 v33.89,26.01
  Route15 0.254: v33.89,26.01 31.18,23.31 18.32,23.31 15.67,25.95 v15.67,26.07
  Bottom 0.152: U3.26 15.95,25.79 v15.67,26.07 | U2.26 33.55,28.95 34.08,28.42 34.08,26.46 33.89,26.27 v33.89,26.01
  Bottom 0.254: JP3.18 3.36,24.3 8.4,24.3 10.43,26.33 15.41,26.33 v15.67,26.07
S19  (via drill 0.35 pad 0.55)
  Top 0.152: U1.27 16.45,29.02 15.8,28.37 15.8,27.08 v16.04,26.85 | U4.27 33.05,26.31 v33.52,26.79
  Route15 0.254: v33.52,26.79 30.45,23.71 19.05,23.71 16.04,26.73 v16.04,26.85
  Bottom 0.152: U3.27 16.45,26.43 v16.03,26.85 | U2.27 33.05,29.02 33.7,28.37 33.7,26.96 v33.52,26.79
  Bottom 0.254: JP3.19 8.41,25.61 9.65,26.85 v16.03,26.85 v16.04,26.85
S20  (via drill 0.35 pad 0.55)
  Top 0.152: U1.28 16.95,28.97 16.31,28.33 16.31,27.72 v16.42,27.61 | U4.28 32.55,26.95 v33.14,27.54
  Route15 0.254: v33.14,27.54 29.71,24.12 19.79,24.12 16.42,27.48 v16.42,27.61
  Bottom 0.152: U3.28 16.95,27.07 v16.42,27.6 v16.42,27.61 | U2.28 32.55,28.97 33.19,28.33 33.19,27.59 v33.14,27.54
  Bottom 0.254: JP3.20 3.42,26.9 8.5,26.9 9.2,27.6 v16.42,27.6
S21  (via drill 0.35 pad 0.55)
  Top 0.152: U4.29 32.05,27.62 v32.53,28.1 | U1.29 17.45,28.58 v17.02,28.15 | v32.53,28.1
  Route15 0.254: v32.53,28.1 32.53,28.03 29.03,24.53 20.49,24.53 17.02,28 v17.02,28.15
  Bottom 0.152: U2.29 32.05,28.58 v32.53,28.1 | U3.29 17.45,27.55 17.02,27.98 v17.02,28.15
  Bottom 0.254: JP3.21 16.05,28.15 16.2,28.3 16.86,28.3 v17.02,28.15
S22  (via drill 0.35 pad 0.55)
  Top 0.152: U4.30 31.55,27.93 v31.73,28.1 | v31.73,28.1 | U1.30 17.95,28.23 v17.83,28.1
  Route15 0.254: v31.73,28.1 31.73,28.18 30.61,29.29 18.89,29.29 17.83,28.23 v17.83,28.1
  Bottom 0.152: U2.30 31.55,28.27 v31.73,28.1 | U3.30 17.95,27.97 v17.82,28.1
  Bottom 0.254: JP3.22 3.34,29.36 16.67,29.36 17.82,28.21 v17.82,28.1 v17.83,28.1
S23  (via drill 0.35 pad 0.55)
  Top 0.152: U4.31 31.05,27.96 v30.91,28.11 | U1.31 18.45,28.29 v18.63,28.11
  Route15 0.254: v30.91,28.11 30.91,28.19 30.3,28.8 19.2,28.8 18.63,28.23 v18.63,28.11
  Bottom 0.152: U3.31 18.45,27.93 v18.63,28.11 | U2.31 31.05,28.25 v30.91,28.11
  Bottom 0.254: JP3.23 6.04,30.69 6.86,29.87 16.93,29.87 18.63,28.17 v18.63,28.11
S24  (via drill 0.35 pad 0.55)
  Top 0.152: U4.32 30.55,27.65 v30.1,28.1 | U1.32 18.95,28.59 v19.44,28.1
  Route15 0.254: v30.1,28.1 29.9,28.3 19.64,28.3 v19.44,28.1
  Bottom 0.152: U2.32 30.55,28.55 v30.1,28.1 | U3.32 18.95,27.64 19.19,27.88 19.41,28.1 v19.44,28.1
  Bottom 0.254: JP3.24 3.34,31.9 6.2,31.9 7.73,30.37 17.23,30.37 19.41,28.19 19.41,28.1
S25  (via drill 0.35 pad 0.55)
  Top 0.152: U1.33 19.45,28.95 20.1,28.3 v20.1,27.6 | U4.33 30.05,26.95 v29.4,27.6
  Route15 0.254: v20.1,27.6 v29.4,27.6
  Bottom 0.152: U3.33 19.45,26.95 v20.1,27.6 | U2.33 30.05,28.95 29.4,28.3 v29.4,27.6
  Bottom 0.254: v20.1,27.6 20.1,28.3 17.52,30.88 8.44,30.88 6.09,33.23 JP3.25
S26  (via drill 0.35 pad 0.55)
  Top 0.152: U1.34 19.95,29.02 20.66,28.31 20.66,27.37 20.5,27.21 v20.5,26.81 | U4.34 29.55,26.26 v29,26.81
  Route15 0.254: v29,26.81 v20.5,26.81
  Bottom 0.152: U3.34 19.95,26.26 v20.5,26.81 | U2.34 29.55,29.02 28.84,28.31 28.84,27.37 29,27.21 v29,26.81
  Bottom 0.254: JP3.26 3.4,34.5 6.1,34.5 9.21,31.39 17.61,31.39 20.8,28.2 20.8,27.11 v20.5,26.81
S27  (via drill 0.35 pad 0.55)
  Top 0.152: U1.35 20.45,28.95 21.06,28.34 21.06,26.57 20.8,26.31 v20.8,26.01 | U4.35 29.05,25.66 v28.7,26.01
  Route15 0.254: v28.7,26.01 v20.8,26.01
  Bottom 0.152: U3.35 20.45,25.66 v20.8,26.01 | U2.35 29.05,28.95 28.44,28.34 28.44,26.57 28.7,26.31 v28.7,26.01
  Bottom 0.254: v20.8,26.01 21.3,26.51 21.3,28.3 17.71,31.89 9.93,31.89 6.05,35.77 JP3.27
S28  (via drill 0.35 pad 0.55)
  Top 0.152: U1.36 20.95,28.95 21.36,28.54 21.36,25.46 v21.1,25.2 | U4.36 28.55,25.05 v28.4,25.2
  Route15 0.254: v21.1,25.2 v28.4,25.2
  Bottom 0.152: U3.36 20.95,25.05 v21.1,25.2 | U2.36 28.55,28.95 28.14,28.54 28.14,25.46 v28.4,25.2
  Bottom 0.254: JP3.28 3.36,37 6.1,37 10.7,32.4 17.8,32.4 21.8,28.4 21.8,25.9 v21.1,25.2
S29  (via drill 0.35 pad 0.55)
  Top 0.152: U1.37 23.12,30.95 v23.6,30.47 | U4.37 24.05,21.45 v23.6,21.9
  Route2 0.152: v23.6,21.9 v23.6,30.47
  Bottom 0.152: U3.37 23.15,21.45 v23.6,21.9 | U2.37 24.08,30.95 v23.6,30.47
  Bottom 0.254: JP3.29 18.44,38.31 21.69,35.06 21.69,32.21 23.43,30.47 v23.6,30.47
S30  (via drill 0.35 pad 0.55)
  Top 0.152: U4.38 23.75,20.95 v23.6,21.1 | U1.38 23.43,31.45 v23.6,31.28
  Route2 0.152: v23.6,21.1 24.16,21.65 24.16,30.72 v23.6,31.28
  Bottom 0.152: U3.38 23.45,20.95 v23.6,21.1 | U2.38 23.77,31.45 v23.6,31.28
  Bottom 0.254: JP3.30 3.42,39.6 17.8,39.6 22.1,35.3 22.1,32.7 23.52,31.28 v23.6,31.28
S31  (via drill 0.35 pad 0.55)
  Top 0.152: U4.39 23.76,20.45 v23.6,20.29 | U1.39 23.46,31.95 v23.6,32.09
  Route2 0.152: v23.6,20.29 24.46,21.15 24.46,31.23 v23.6,32.09
  Bottom 0.152: U3.39 23.44,20.45 v23.6,20.29 | U2.39 23.74,31.95 v23.6,32.09
  Bottom 0.254: JP3.31 17.15,40.85 22.59,35.41 22.59,33.01 23.51,32.09 v23.6,32.09
S32  (via drill 0.35 pad 0.55)
  Top 0.152: U1.40 23.16,32.45 v23.6,32.89 | U4.40 24.07,19.95 v23.6,19.48
  Route2 0.152: v23.6,19.48 24.78,20.67 24.78,31.71 v23.6,32.89
  Bottom 0.152: U3.40 23.13,19.95 v23.6,19.48 | U2.40 24.04,32.45 v23.6,32.89
  Bottom 0.254: v23.6,32.89 23,33.49 23,35.6 16.49,42.11 3.39,42.11 JP3.32
SCLK  (via drill 0.35, 0.35 pad 0.55)
  Top 0.152: U4.19 36.25,18.95 v36.6,19.3 | U1.19 13.25,33.45 v12.9,33.1
  Top 0.254: v9.61,3.8 9.61,4.01 10.1,4.5 14.4,4.5 15.6,3.3 J2.P$5
  Route2 0.254: v12.9,33.1 17.4,37.6 32.1,37.6 v36.6,33.1 | v36.6,19.3 32.1,14.8 17.47,14.8 17.47,14.84 v12.91,19.4 9,15.49 9,7.3 9.6,6.7 v9.6,3.81 v9.61,3.8
  Route15 0.254: v12.9,33.1 12.9,19.41 v12.91,19.4 | v36.6,33.1 35.89,32.39 35.89,19.91 36.5,19.3 v36.6,19.3
  Bottom 0.152: U2.19 36.25,33.45 v36.6,33.1 | U3.19 13.36,18.95 v12.91,19.4
  Bottom 0.254: J1.P$5 v9.6,3.79 v9.61,3.8

## Text on the board
tNames: 31 | 1